# Altium PCB PCB1.PcbDoc
Units mm, origin at the board's own origin, x right, y up, seen from the top; angles counter-clockwise.
Board outline 91.44 x 76.2 mm, 4 copper layers (Top Layer, Power, GND, Bottom Layer), stack 0.568 mm thick; 59 components, 52 nets, 311 pads, 99 vias.
Unrouted connection lines stored in the file: 2.
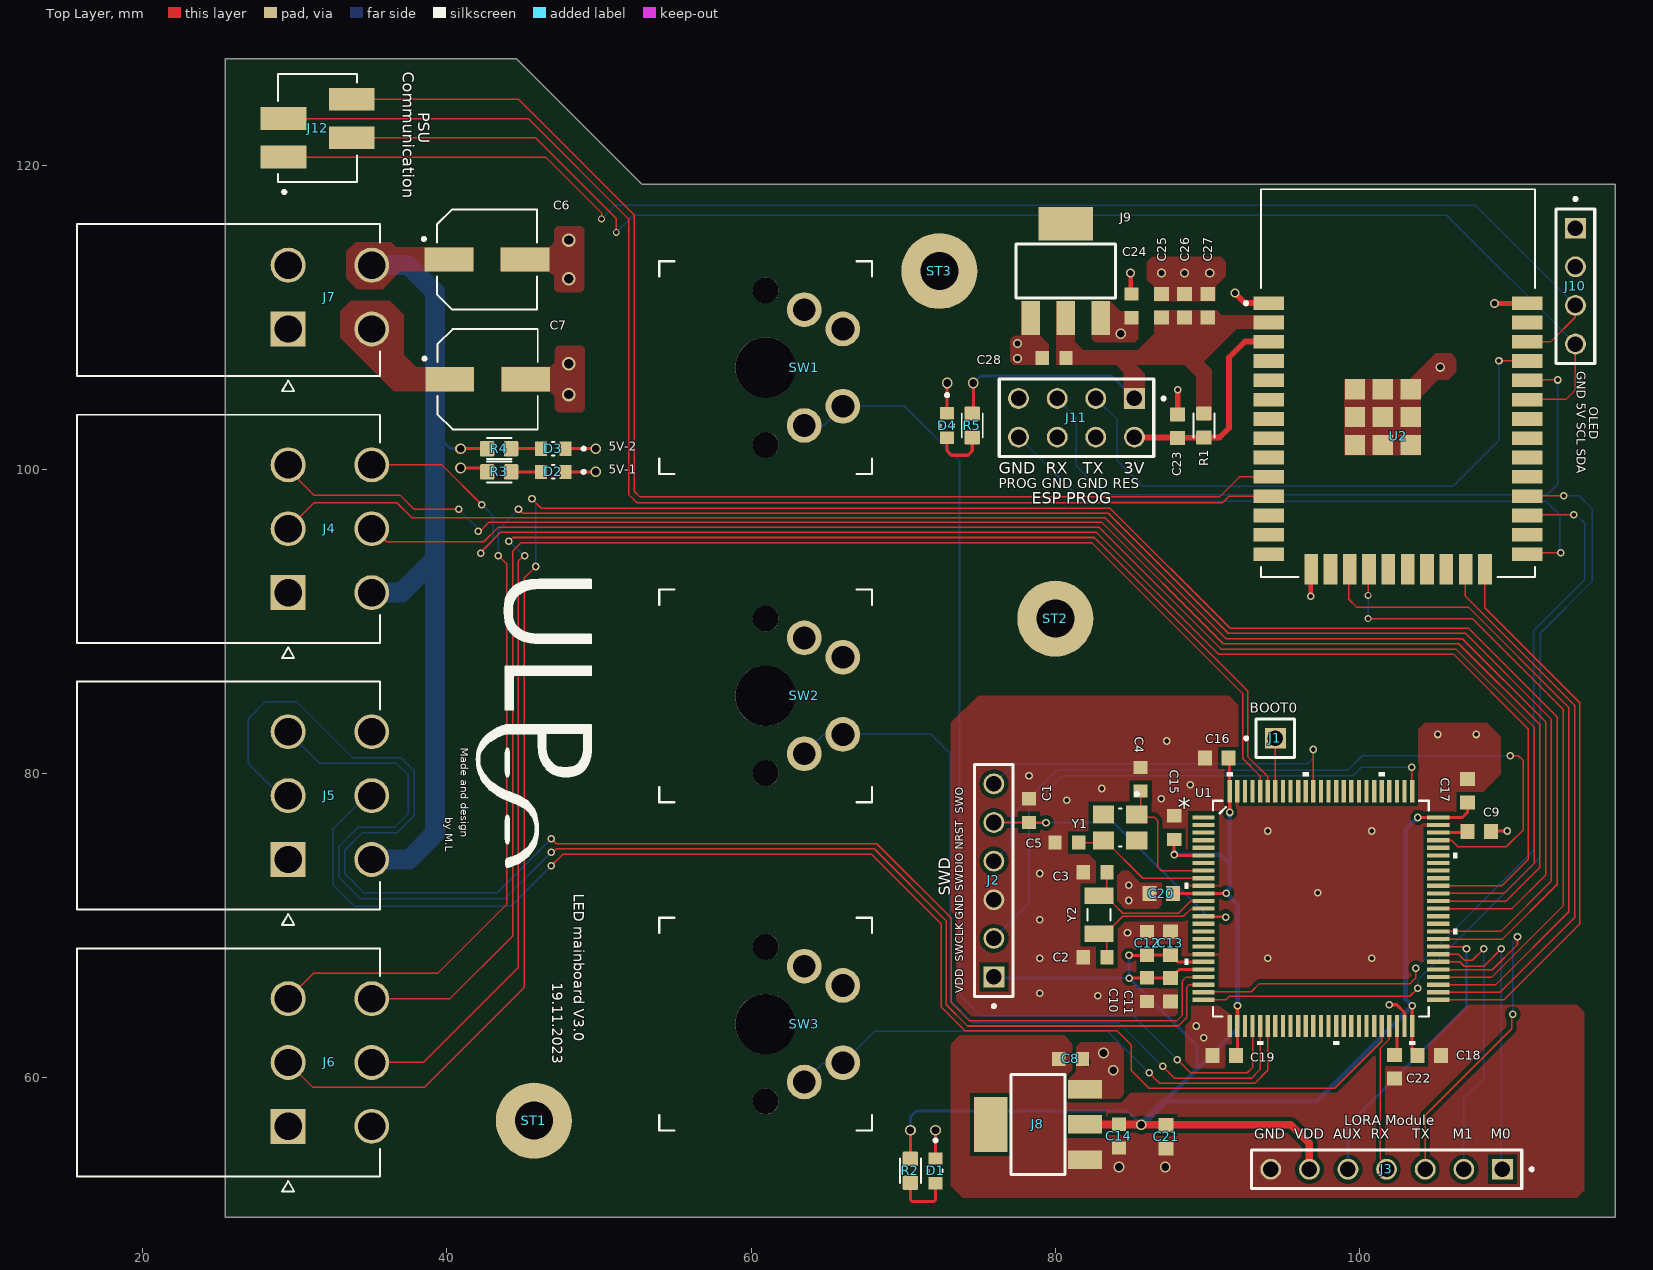
[diagram p0: Top Layer view]
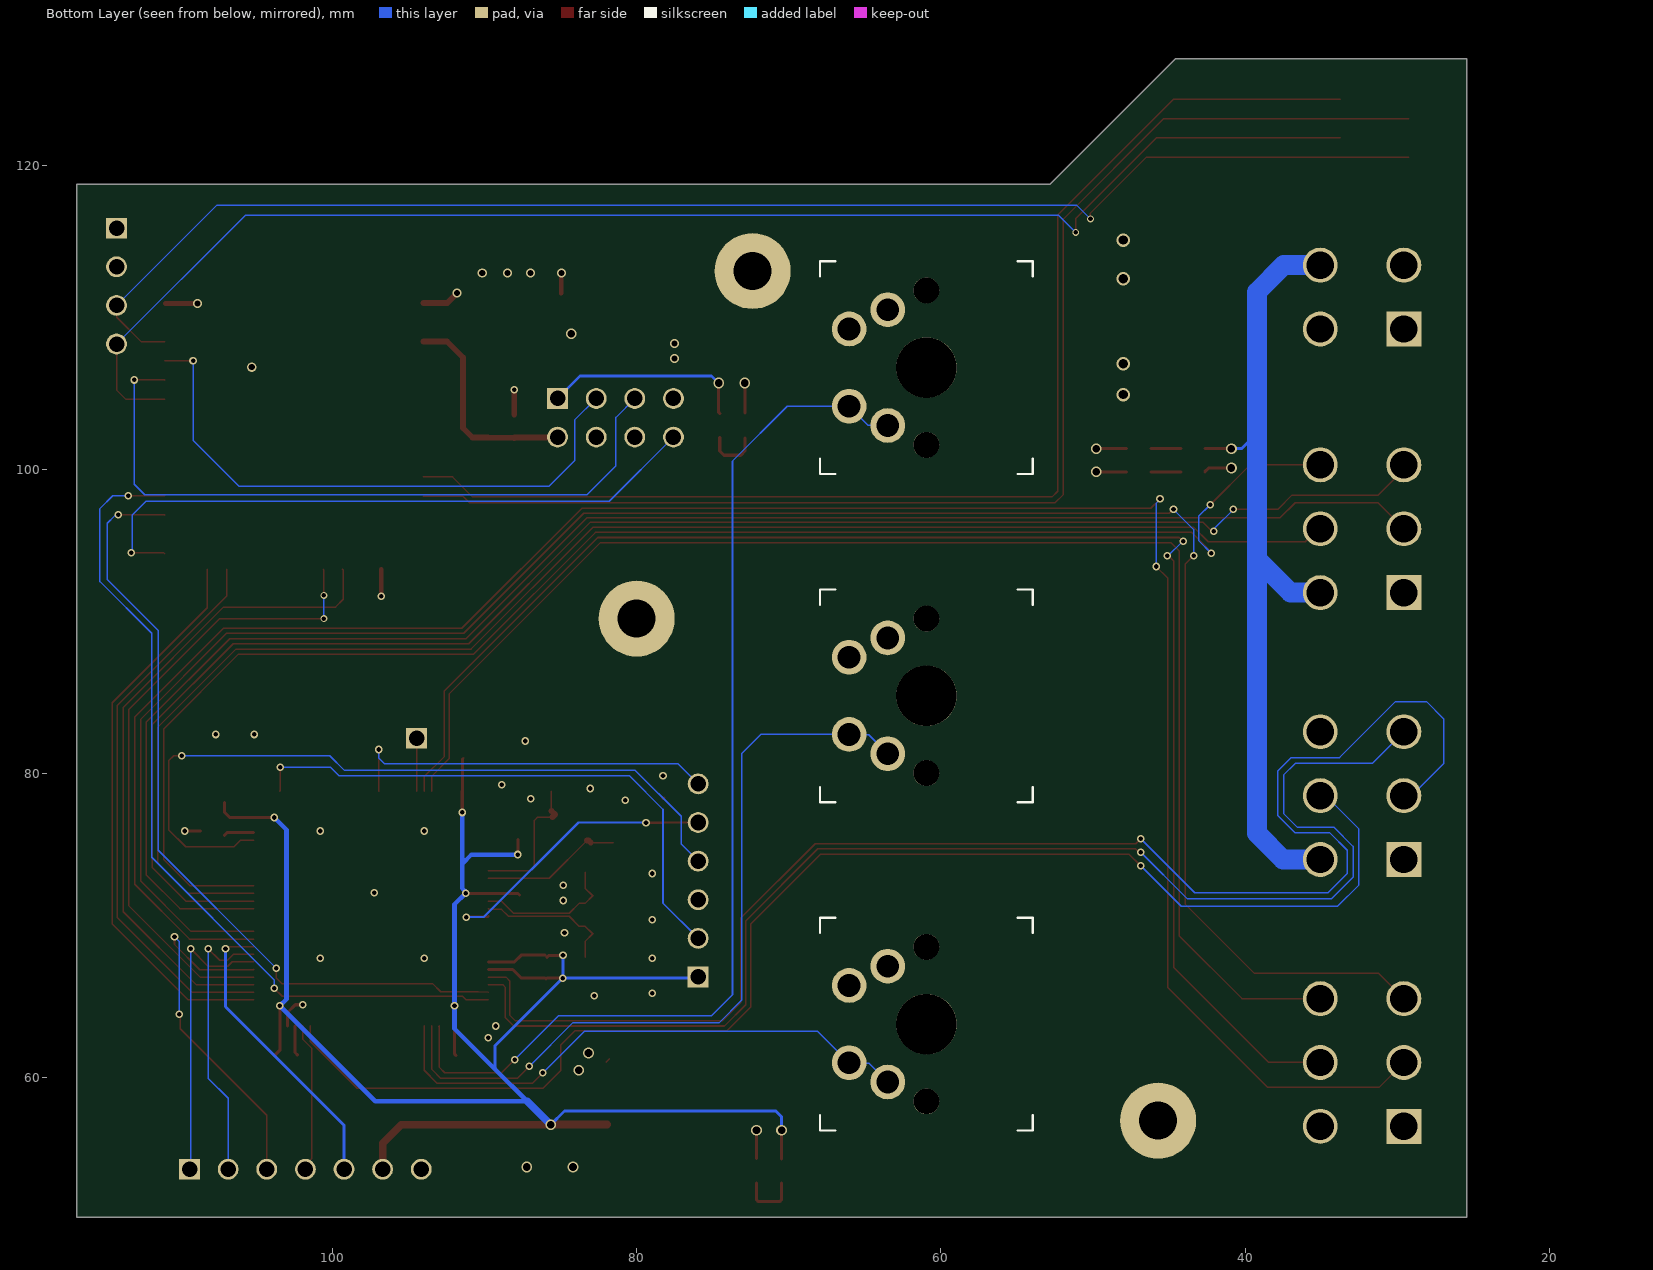
[diagram p1: Bottom Layer view, seen from below]
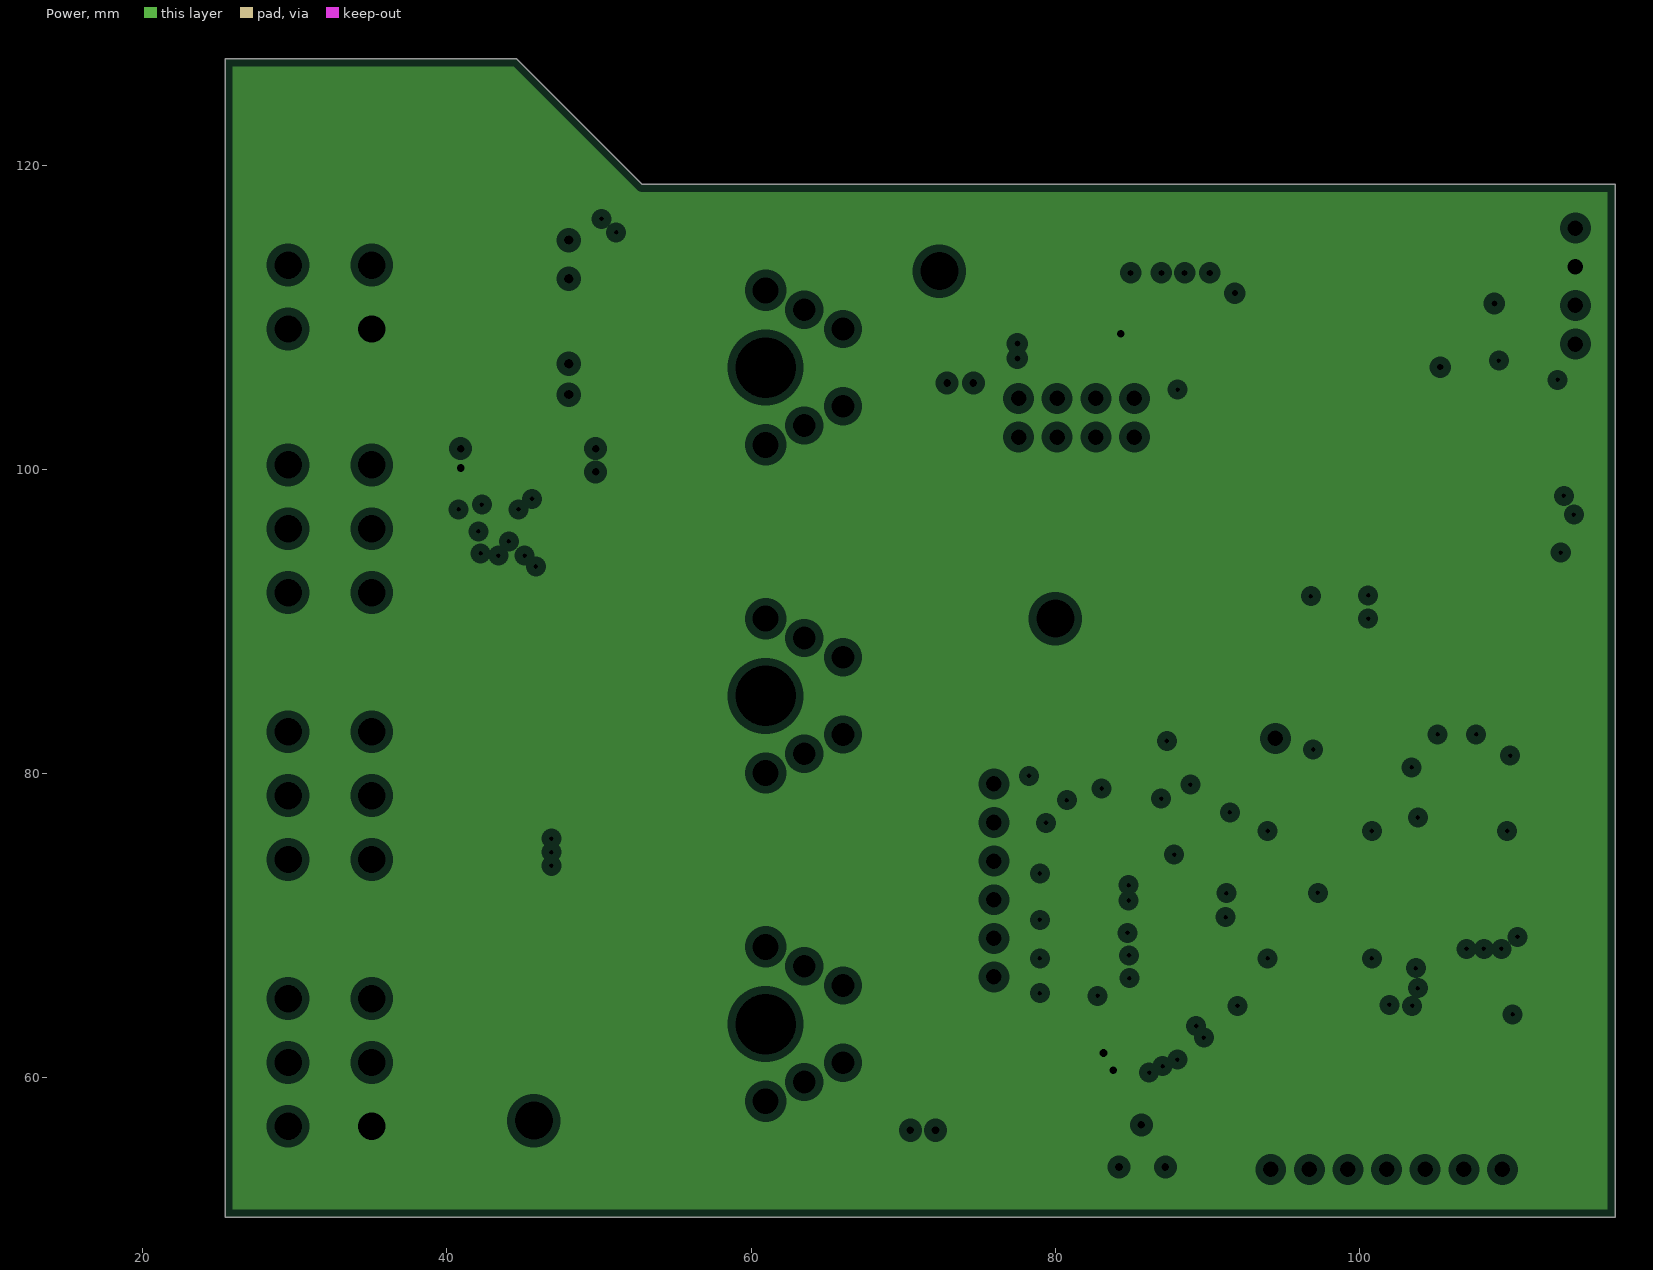
[diagram p2: Power, clearances drawn from the general rule]
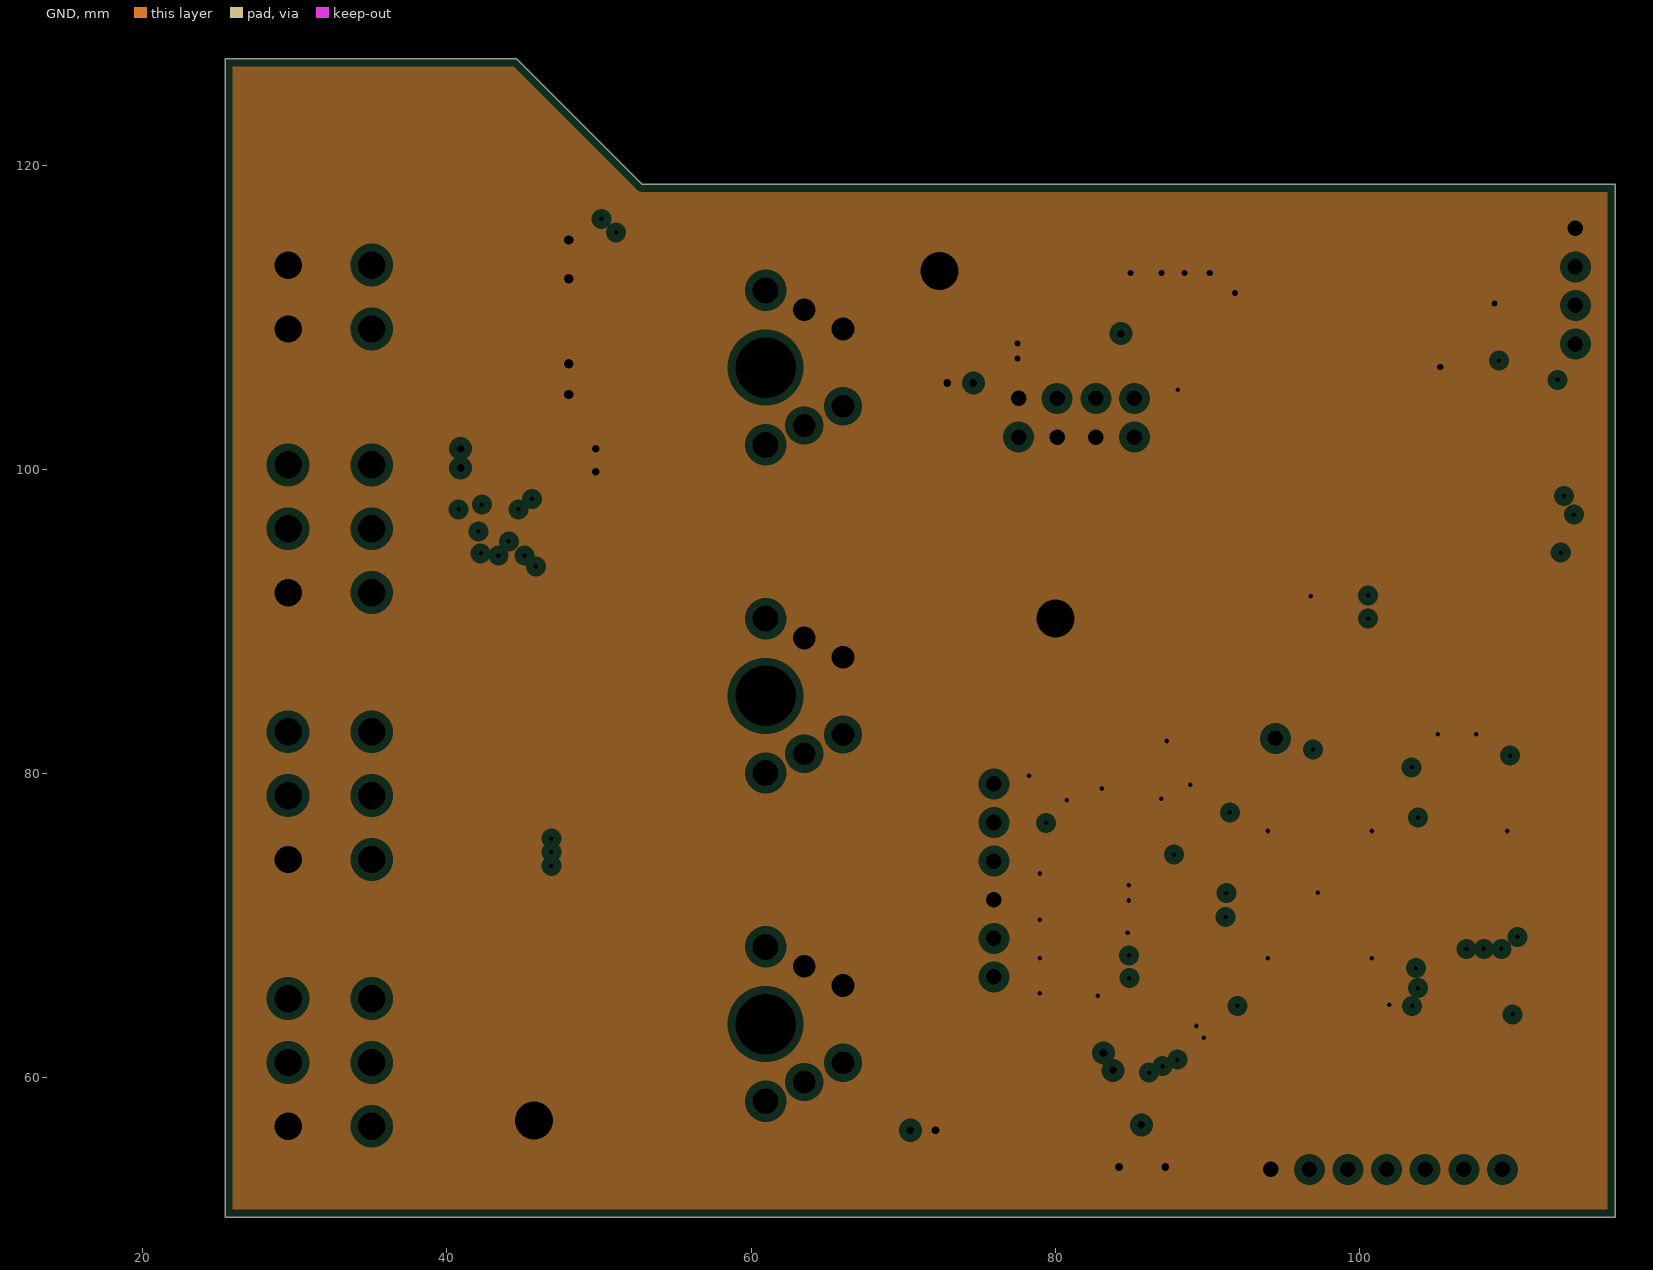
[diagram p3: GND, clearances drawn from the general rule]
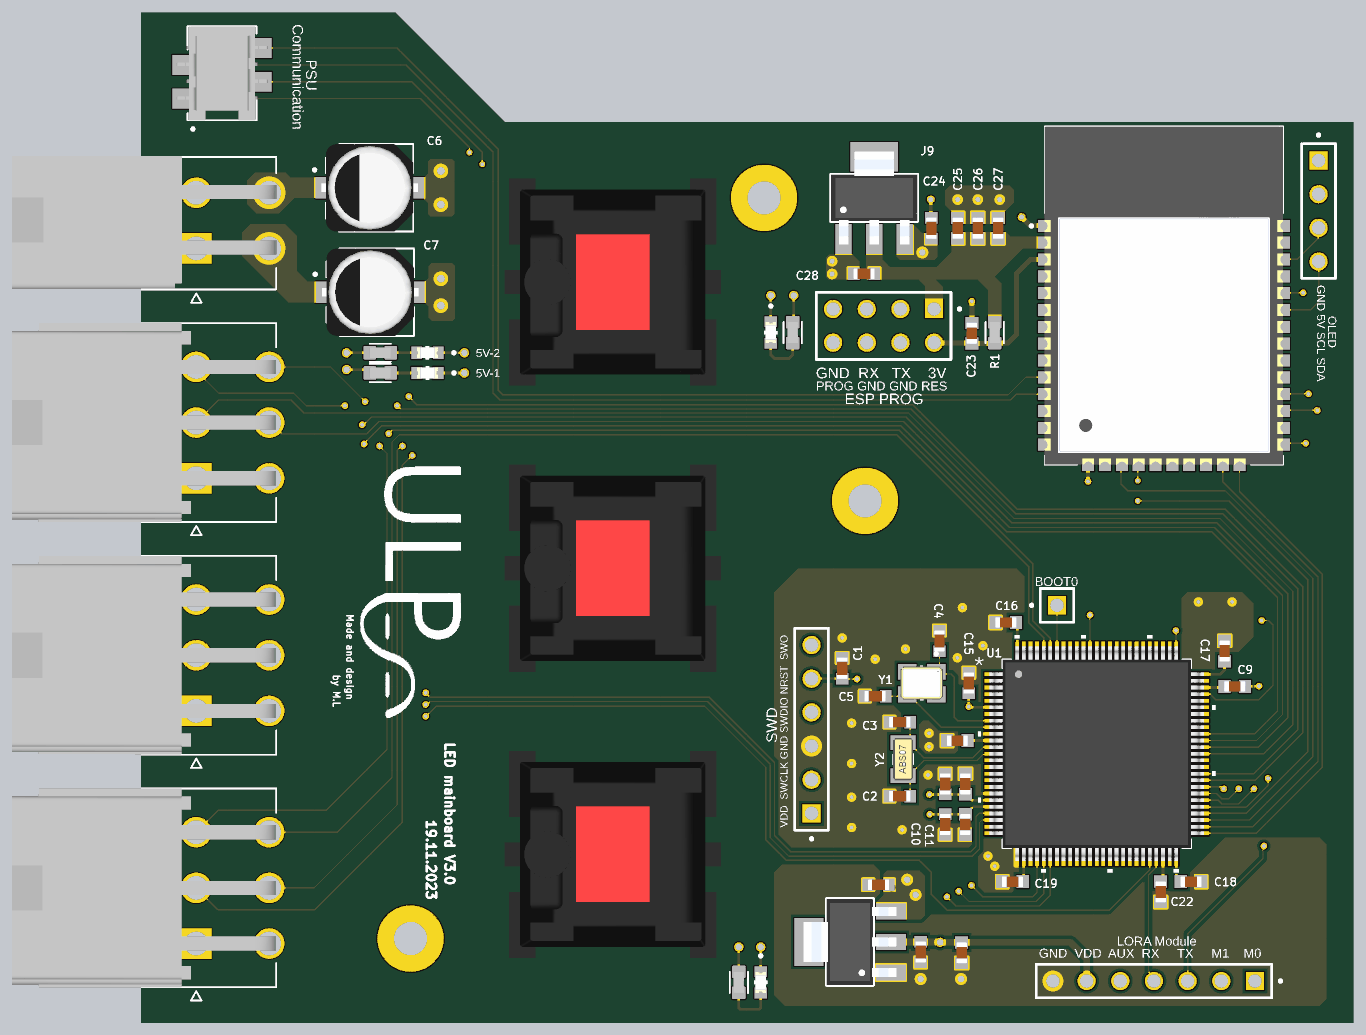
[diagram p4: 3D render of the assembled board from above, using the file's embedded part models]

## Layer stack, top to bottom
Top Solder: solder mask 0.0102, Solder Resist, Dk 3.5
Top Layer: signal copper 0.0356
Dielectric 2: prepreg 0.0711, PP-006, Dk 4.1
Power: plane copper 0.0175, net +5
Dielectric 1: dielectric 0.32, FR-4, Dk 4.8
GND: plane copper 0.0175, net GND
Dielectric 3: prepreg 0.0711, PP-006, Dk 4.1
Bottom Layer: signal copper 0.0356
Bottom Solder: solder mask 0.0102, Solder Resist, Dk 3.5

## Board outline
116.84,118.745 52.832,118.745 44.577,127 25.4,127 25.4,50.8 116.84,50.8

## Design rules (kind name [scope] priority, off if disabled: settings)
Clearance [All] p1: gap=0.254 ignorepadtopadclearanceinfootprint=FALSE except(0: Arc-Hole Track-Hole SMDPad-Hole THPad-Hole Via-Hole Fill-Hole Poly-Hole Region-Hole Text-Hole; 0.09: Arc-Arc Arc-Track Track-Track; 0.127: SMDPad-SMDPad; 0.5: SMDPad-THPad)
PlaneClearance [All] p1: clearance=0.508
PlaneConnect [All] p1: planeconnectstyle=Relief reliefexpansion=0.508 reliefentries=4 reliefconductorwidth=0.254 reliefairgap=0.254
PolygonConnect [All] p1: connectstyle=Direct reliefconductorwidth=0.254 reliefentries=4 polygonreliefangle="90 Angle" airgapwidth=0.254
RoutingVias [All] p1: holewidth=0.711 width=1.27 viastyle="Through Hole" minholewidth=0.3 minwidth=0.45 maxholewidth=0.711 maxwidth=1.27
SolderMaskExpansion [All] p1: expansion=0.102 istentingtop=FALSE
Width [All] p1: maxlimit=2 minlimit=0.09 preferedwidth=0.2
28 further rules are at their usual default settings.

## Classes and differential pairs
component class STM32_IO: C1 C2 C3 C4 C5 J1 J2 J3 J4 J5 J6 SW1 SW2 SW3 U1 Y1 Y2
component class Power: C6 C7 C8 C9 C10 C11 C12 C13 C14 C15 C16 C17 C18 C19 C20 C21 C22 D1 D2 D3 J7 J8 R2 R3 R4 ST1 ST2 ST3
component class ESP32: C23 C24 C25 C26 C27 C28 D4 J9 J10 J11 J12 R1 R5 U2

## Components (designator, comment, footprint, x,y, rotation, side; value= is the part's Value field where it differs from the comment)
C1 "CL10C180JB8NNNC" CAPC1608X90N#1 78.283,77.546 r90 top
C2 "CL10C180JB8NNNC" CAPC1608X90N#1 82.626,67.894 r0 top
C3 "CL10C180JB8NNNC" CAPC1608X90N#1 82.626,73.482 r0 top
C4 "CL10C100JB8NNNC" CAPC1608X90N#1 85.623,79.604 r270 top
C5 "CL10C100JB8NNNC" CAPC1608X90N#1 80.772,75.438 r0 top
C6 "EEEFT1E101AP" CAP_EEEFT1E101AP 42.632,113.792 r0 top
C7 "EEEFT1E101AP" CAP_EEEFT1E101AP 42.672,105.918 r0 top
C8 "CL10A105KA8NNNC" CAPC1608X90N#1 81.026,61.214 r180 top
C9 "CL10A225KO8NNNC" CAPC1608X90N#2 107.899,76.175 r180 top
C10 "CL10A105KA8NNNC" CAPC1608X90N#1 86.055,65.761 r270 top
C11 "06035C104KAT2A" CAPC1608X90N#2 87.579,65.761 r90 top
C12 "CL10A105KA8NNNC" CAPC1608X90N#1 86.055,68.809 r90 top
C13 "06035C104KAT2A" CAPC1608X90N#2 87.579,68.809 r270 top
C14 "CL10A105KA8NNNC" CAPC1608X90N#1 84.201,56.134 r270 top
C15 "CL10A105KA8NNNC" CAPC1608X90N#1 87.833,76.429 r90 top
C16 "06035C104KAT2A" CAPC1608X90N#2 90.627,81.001 r0 top
C17 "06035C104KAT2A" CAPC1608X90N#2 107.137,78.842 r270 top
C18 "06035C104KAT2A" CAPC1608X90N#2 104.597,61.443 r180 top
C19 "06035C104KAT2A" CAPC1608X90N#2 91.135,61.443 r0 top
C20 "06035C104KAT2A" CAPC1608X90N#2 86.97,72.085 r0 top
C21 "CL10A475MA8NQNC" CAPC1608X90N#2 87.3,56.083 r90 top
C22 "CL10A225KO8NNNC" CAPC1608X90N#2 102.311,60.681 r270 top
C23 "06035C104KAT2A" CAPC1608X90N#2 88.062,102.819 r270 top
C24 "CL10A105KA8NNNC" CAPC1608X90N#1 85.014,110.744 r90 top
C25 "06035C104KAT2A" CAPC1608X90N#2 86.995,110.744 r90 top
C26 "06035C104KAT2A" CAPC1608X90N#2 88.519,110.744 r270 top
C27 "06035C104KAT2A" CAPC1608X90N#2 90.043,110.744 r270 top
C28 "CL10A105KA8NNNC" CAPC1608X90N#1 79.934,107.315 r0 top
D1 "LTST-C190KGKT" LEDC1608X35N 72.136,53.848 r270 top
D2 "LTST-C191TBKT" LEDC1608X35N 46.99,99.822 r180 top
D3 "LTST-C191TBKT" LEDC1608X35N 46.99,101.346 r180 top
D4 "LTST-C190KGKT" LEDC1608X35N 72.898,102.87 r270 top
J1 "TSW-101-07-G-S" SAMTEC_TSW-101-07-G-S 94.488,82.296 r0 top
J2 "TSW-106-07-G-S" SAMTEC_TSW-106-07-G-S 75.971,72.949 r90 top
J3 "TSW-107-07-G-S" SAMTEC_TSW-107-07-G-S 101.803,53.95 r180 top
J4 "874270602" MOLEX_874270602 29.552,91.879 r270 top
J5 "874270602" MOLEX_874270602 29.552,74.328 r270 top
J6 "874270602" MOLEX_874270602 29.552,56.776 r270 top
J7 "353180420" MOLEX_353180420 29.552,109.22 r270 top
J8 "LD1117AS33TR" SOT223 78.867,56.896 r90 top
J9 "LD1117AS33" SOT223 80.696,113.03 r0 top
J10 "TSW-104-07-G-S" SAMTEC_TSW-104-07-G-S 114.224,112.039 r270 top
J11 "TSW-104-07-G-D" SAMTEC_TSW-104-07-G-D 81.407,103.378 r180 top
J12 "7-188275-4" TE_7-188275-4 31.496,122.428 r90 top
R1 "2176051-5" RESC1608X50N 89.789,102.87 r270 top
R2 "RP73PF1J10KBTDF" RESC1608X50N 70.485,53.848 r90 top
R3 "RP73PF1J10KBTDF" RESC1608X50N 43.434,99.822 r180 top
R4 "RP73PF1J10KBTDF" RESC1608X50N 43.434,101.346 r180 top
R5 "RP73PF1J10KBTDF" RESC1608X50N 74.549,102.87 r90 top
ST1 "PTH-M2D5X5" PTH-M2D5X5 45.72,57.15 r0 top
ST2 "PTH-M2D5X5" PTH-M2D5X5 80.01,90.17 r0 top
ST3 "PTH-M2D5X5" PTH-M2D5X5 72.39,113.03 r0 top
SW1 "Kailh" SW_MX_reversible 60.96,106.68 r270 top
SW2 "Kailh" SW_MX_reversible 60.96,85.09 r270 top
SW3 "Kailh" SW_MX_reversible 60.96,63.5 r270 top
U1 "STM32H723VGT6" LQFP100_STM 97.485,71.095 r0 top
U2 "ESP32-WROOM-32" MODULE_ESP32-WROOM-32 102.556,105.662 r0 top
Y1 "QT325G-25.000MEEV-T" XTAL_QT325G-25.000MEEV-T 84.277,76.429 r270 top
Y2 "ABS07-32.768KHZ-T" XTAL_ABS07-32.768KHZ-T 82.88,70.688 r90 top

## Footprints (in the part's own frame and the unit in brackets; to place one, negate y for a bottom-side part, rotate by r counter-clockwise, add the part's x,y. Pads: shape width x height; smd on the part's side, far side on the other; paste and mask are expansions set on the pad)
CAP_EEEFT1E101AP [mm]
  rect 3.2x1.6 smd: 1(-2.5,0) 2(2.5,0)
  silkscreen extent -4.25,-3.3 3.3,3.3, body extent -3.65,-3.3 3.65,3.3, height 5.8
CAPC1608X90N#1 [mm]
  rect 0.87x0.93 smd: 1(-0.78,0) 2(0.78,0)
  body extent -0.8,-0.4 0.8,0.4, height 0.45
CAPC1608X90N#2 [mm]
  rect 0.92x0.98 smd: 1(-0.775,0) 2(0.775,0)
  body extent -0.8,-0.41 0.8,0.41, height 0.9
LEDC1608X35N [mm]
  rect 0.81x0.93 smd: A(0.81,0) C(-0.81,0)
  silkscreen extent -2.1,-0.45 0.09,0.45, body extent -0.8,-0.4 0.8,0.4, height 0.8
LQFP100_STM [mil]
  rect 58x11 smd paste-29 mask+5: 1(-304,236.22) 2(-304,216.54) 3(-304,196.85) 4(-304,177.17) 5(-304,157.48) 6(-304,137.8) 7(-304,118.11) 8(-304,98.43) 9(-304,78.74) 10(-304,59.06) 11(-304,39.37) 12(-304,19.69) 13(-304,0) 14(-304,-19.68) 15(-304,-39.37) 16(-304,-59.06) 17(-304,-78.74) 18(-304,-98.43) 19(-304,-118.11) 20(-304,-137.8) 21(-304,-157.48) 22(-304,-177.17) 23(-304,-196.85) 24(-304,-216.54) 25(-304,-236.22) 51(304,-236.22) 52(304,-216.54) 53(304,-196.85) 54(304,-177.17) 55(304,-157.48) 56(304,-137.8) 57(304,-118.11) 58(304,-98.43) 59(304,-78.74) 60(304,-59.06) 61(304,-39.37) 62(304,-19.68) 63(304,0) 64(304,19.68) 65(304,39.37) 66(304,59.06) 67(304,78.74) 68(304,98.43) 69(304,118.11) 70(304,137.8) 71(304,157.48) 72(304,177.17) 73(304,196.85) 74(304,216.54) 75(304,236.22)
  rect 11x58 smd paste-29 mask+5: 26(-236.22,-304) 27(-216.54,-304) 28(-196.85,-304) 29(-177.17,-304) 30(-157.48,-304) 31(-137.8,-304) 32(-118.11,-304) 33(-98.43,-304) 34(-78.74,-304) 35(-59.06,-304) 36(-39.37,-304) 37(-19.68,-304) 38(0,-304) 39(19.68,-304) 40(39.37,-304) 41(59.06,-304) 42(78.74,-304) 43(98.43,-304) 44(118.11,-304) 45(137.8,-304) 46(157.48,-304) 47(177.17,-304) 48(196.85,-304) 49(216.54,-304) 50(236.22,-304) 76(236.22,304) 77(216.54,304) 78(196.85,304) 79(177.17,304) 80(157.48,304) 81(137.8,304) 82(118.11,304) 83(98.43,304) 84(78.74,304) 85(59.06,304) 86(39.37,304) 87(19.68,304) 88(0,304) 89(-19.68,304) 90(-39.37,304) 91(-59.06,304) 92(-78.74,304) 93(-98.43,304) 94(-118.11,304) 95(-137.8,304) 96(-157.48,304) 97(-177.17,304) 98(-196.85,304) 99(-216.54,304) 100(-236.22,304)
  silkscreen extent -353,-353 353,353, body extent -319,-319 319,319, height 63
MODULE_ESP32-WROOM-32 [mm]
  rect 2x0.9 smd: 1(-8.5,5.26) 2(-8.5,3.99) 3(-8.5,2.72) 4(-8.5,1.45) 5(-8.5,0.18) 6(-8.5,-1.09) 7(-8.5,-2.36) 8(-8.5,-3.63) 9(-8.5,-4.9) 10(-8.5,-6.17) 11(-8.5,-7.44) 12(-8.5,-8.71) 13(-8.5,-9.98) 14(-8.5,-11.25) 25(8.5,-11.25) 26(8.5,-9.98) 27(8.5,-8.71) 28(8.5,-7.44) 29(8.5,-6.17) 30(8.5,-4.9) 31(8.5,-3.63) 32(8.5,-2.36) 33(8.5,-1.09) 34(8.5,0.18) 35(8.5,1.45) 36(8.5,2.72) 37(8.5,3.99) 38(8.5,5.26)
  rect 0.9x2 smd: 15(-5.715,-12.25) 16(-4.445,-12.25) 17(-3.175,-12.25) 18(-1.905,-12.25) 19(-0.635,-12.25) 20(0.635,-12.25) 21(1.905,-12.25) 22(3.175,-12.25) 23(4.445,-12.25) 24(5.715,-12.25)
  rect 1.33x1.33 smd: 39_1(-2.835,-0.405) 39_2(-1,-0.405) 39_3(0.835,-0.405) 39_4(-2.835,-2.24) 39_5(-1,-2.24) 39_6(0.835,-2.24) 39_7(-2.835,-4.075) 39_8(-1,-4.075) 39_9(0.835,-4.075)
  silkscreen extent -10.1,-12.75 9,12.75, body extent -9,-12.75 9,12.75, height 3.2
MOLEX_353180420 [mm]
  rect 2.3x2.3 / inner round 2.3 / far side rect 2.3x2.3 hole 1.8 mask+0.076: 1(0,0)
  round 2.3 hole 1.8 mask+0.076: 2(-4.2,0) 3(0,5.5) 4(-4.2,5.5)
  silkscreen extent -6.9,-13.9 4.1,6.04, body extent -6.96,-13.89 3.04,6.04, height 12.83
MOLEX_874270602 [mm]
  rect 2.3x2.3 / inner round 2.3 / far side rect 2.3x2.3 hole 1.8 mask+0.076: 1(0,0)
  round 2.3 hole 1.8 mask+0.076: 2(-4.2,0) 3(-8.4,0) 4(0,5.5) 5(-4.2,5.5) 6(-8.4,5.5)
  silkscreen extent -11.7,-13.9 4.3,6.04, body extent -11.7,-13.9 3.3,6.03, height 11.4
PTH-M2D5X5 [mm]
  round 5 hole 2.5: 1(0,0)
RESC1608X50N [mm]
  rrect20% 0.94x1.02 smd: 1(-0.79,0) 2(0.79,0)
  silkscreen extent -0.8,-0.69 0.8,0.69, body extent -0.8,-0.4 0.8,0.4, height 0.23
SAMTEC_TSW-101-07-G-S [mm]
  rect 1.37x1.37 hole 1.02: 01(0,0)
  silkscreen extent -2.02,-1.27 1.27,1.27
SAMTEC_TSW-104-07-G-D [mm]
  rect 1.37x1.37 hole 1.02: 01(-3.81,-1.27)
  round 1.37 hole 1.02: 02(-3.81,1.27) 03(-1.27,-1.27) 04(-1.27,1.27) 05(1.27,-1.27) 06(1.27,1.27) 07(3.81,-1.27) 08(3.81,1.27)
  silkscreen extent -5.83,-2.54 5.08,2.54
SAMTEC_TSW-104-07-G-S [mm]
  rect 1.37x1.37 hole 1.02: 01(-3.81,0)
  round 1.37 hole 1.02: 02(-1.27,0) 03(1.27,0) 04(3.81,0)
  silkscreen extent -5.83,-1.27 5.08,1.27
SAMTEC_TSW-106-07-G-S [mm]
  rect 1.37x1.37 hole 1.02: 01(-6.35,0)
  round 1.37 hole 1.02: 02(-3.81,0) 03(-1.27,0) 04(1.27,0) 05(3.81,0) 06(6.35,0)
  silkscreen extent -8.37,-1.27 7.62,1.27
SAMTEC_TSW-107-07-G-S [mm]
  rect 1.37x1.37 hole 1.02: 01(-7.62,0)
  round 1.37 hole 1.02: 02(-5.08,0) 03(-2.54,0) 04(0,0) 05(2.54,0) 06(5.08,0) 07(7.62,0)
  silkscreen extent -9.64,-1.27 8.89,1.27
SOT223 [mm]
  rect 1.219x2.235 smd: 1(-2.311,-3.099) 2(0,-3.099) 3(2.311,-3.099)
  rect 3.6x2.2 smd: TAB(0,3.099)
  silkscreen extent -3.28,-1.78 3.28,1.78, body extent -3.25,-3.5 3.25,3.5, height 1.8
SW_MX_reversible [mil]
  round 90 hole 59: 1(-150,100) 1(-100,200) 2(100,200) 2(150,100)
  round 157 hole 157: Un1(0,0)
  round 67 hole 67: Un2(200,0) Un3(-200,0)
  silkscreen extent -276,-276 276,276, body extent -308,-321 308,322, height 588
TE_7-188275-4 [mm]
  rect 1.5x3 smd: 1(-1.905,2.25) 2(-0.635,-2.25) 3(0.635,2.25) 4(1.905,-2.25)
  silkscreen extent -4.3,-2.6 3.55,2.6, body extent -3.55,-3.45 3.55,3.45, height 5.23
XTAL_ABS07-32.768KHZ-T [mm]
  rect 1.1x1.9 smd: 1(-1.25,0) 2(1.25,0)
  silkscreen extent -0.38,-0.75 0.38,0.75, body extent -1.6,-0.75 1.6,0.75, height 0.89
XTAL_QT325G-25.000MEEV-T [mm]
  rect 1.2x1.4 smd: 1(-0.85,1.1) 2(-0.85,-1.1) 3(0.85,-1.1) 4(0.85,1.1)
  silkscreen extent -2.3,-0.08 1.25,1.2, body extent -1.25,-1.6 1.25,1.6, height 0.9

## Part data
C1: library part CL10A105KA8NNNC, "100nF 0603", Package=None, Availability=Unavailable, MF="{'manufacturer': u'Samsung Electro-Mechanics'}", MP=CL10A105KA8NNNC, Price=None
C2 C3 C4 C5: library part CL10A105KA8NNNC, "18pf 0603", Package=None, Availability=Unavailable, MF="{'manufacturer': u'Samsung Electro-Mechanics'}", MP=CL10A105KA8NNNC, Price=None
C6 C7: "10uF 25V", Package=None, Availability=Unavailable, MF="{'manufacturer': u'Panasonic Electronic'}", MP=EEEFT1E101AP, Price=None
C8 C14: "10uf 0603", Package=None, Availability=Unavailable, MF="{'manufacturer': u'Samsung Electro-Mechanics'}", MP=CL10A105KA8NNNC, Price=None
C9 C22: library part 06035C104KAT2A, "2,2uf 0603", Package=None, Availability=Unavailable, MF="{'manufacturer': u'AVX'}", MP=06035C104KAT2A, Price=None
C10 C12 C15: "1uf 0603", Package=None, Availability=Unavailable, MF="{'manufacturer': u'Samsung Electro-Mechanics'}", MP=CL10A105KA8NNNC, Price=None
C11 C13 C16 C17 C18 C19 C20: "100nf 0603", Package=None, Availability=Unavailable, MF="{'manufacturer': u'AVX'}", MP=06035C104KAT2A, Price=None
C21: library part 06035C104KAT2A, "4,7uf 0603", Package=None, Availability=Unavailable, MF="{'manufacturer': u'AVX'}", MP=06035C104KAT2A, Price=None
C23 C25 C26 C27: "100nF 0603", Package=None, Availability=Unavailable, MF="{'manufacturer': u'AVX'}", MP=06035C104KAT2A, Price=None
C24 C28: "10uF 16V 0603", Package=None, Availability=Unavailable, MF="{'manufacturer': u'Samsung Electro-Mechanics'}", MP=CL10A105KA8NNNC, Price=None
D1 D4: "LED; SMD; 0603; Green; 18-180mcd; 1.6x0.8x0.8mm; 130Â°; 1.6Ă·2.4V; 20mA <a href=\"https://pricing.snapeda.com/parts/LTST-C190KGKT/Lite-On%20Inc./view-part?ref=eda\">Check availability</a>", Package=None, Availability=Unavailable, MF="{'manufacturer': u'Lite-On Electronics'}", MP=LTST-C190KGKT, Price=None
D2 D3: library part LTST-C190KGKT, "0603 blue", Package=None, Availability=Unavailable, MF="{'manufacturer': u'Lite-On Electronics'}", MP=LTST-C190KGKT, Price=None
J1 J2 J4 J5 J6 J9 J12 U2: Package=None, Availability=Unavailable, Price=None
  J1: MF="{'manufacturer': u'Samtec Inc.'}", MP=TSW-101-07-G-S
  J2: MF="{'manufacturer': u'Samtec Inc.'}", MP=TSW-106-07-G-S
  J4 J5 J6: MP=874270602
  J9: MF="{'manufacturer': u'STMicroelectronics'}", MP=LD1117AS33
  J12: MF="{'manufacturer': u'TE Connectivity'}", MP=7-188275-4
  U2: MF="{'manufacturer': u'Espressif Systems'}", MP=ESP32-WROOM-32
J3: "<a href=\"https://pricing.snapeda.com/parts/TSW-107-07-G-S/Samtec%20Inc./view-part?ref=eda\">Check availability</a>", Package=None, Availability=Unavailable, MF="{'manufacturer': u'Samtec Inc.'}", MP=TSW-107-07-G-S, Price=None
J7: "Connector Header Through Hole, Right Angle 4 position 0.165in (4.20mm)", Package=None, Availability=Unavailable, MF="{'manufacturer': u'Molex'}", MP=353180420, Price=None
J8: library part LD1117AS33, "Linear Voltage Regulator 3.3V, 1.15V drop", Package="SOT-223 STMicroelectronics", Availability="In Stock", Check_prices=https://www.snapeda.com/parts/LD1117AS33/STMicroelectronics/view-part/?ref=eda, MF=STMicroelectronics, MP=LD1117AS33, Price=None, Purchase-URL=https://pricing.snapeda.com/search/part/LD1117AS33/?ref=eda, SnapEDA_Link=https://www.snapeda.com/parts/LD1117AS33/STMicroelectronics/view-part/?ref=snap
J10: "2,54 goldpin", Package=None, Availability=Unavailable, MF="{'manufacturer': u'Samtec'}", MP=TSW-104-07-G-S, Price=None
J11: "2.54mm goldpin", Package=None, Availability=Unavailable, MF="{'manufacturer': u'Samtec'}", MP=TSW-104-07-G-D, Price=None
R1: "0603 10k ohm", Package=None, Availability=Unavailable, MF="{'manufacturer': u'TE Connectivity'}", MP=2176051-5, Price=None
R2 R5: "80Ohm 0603", Package=None, Availability=Unavailable, MF="{'manufacturer': u'TE Connectivity'}", MP=RP73PF1J10KBTDF, Price=None
R3 R4: "20Ohm 0603", Package=None, Availability=Unavailable, MF="{'manufacturer': u'TE Connectivity'}", MP=RP73PF1J10KBTDF, Price=None
ST1 ST2 ST3: library part CMP-00028-00004-2, "M2 PTH (2.5mm), 5mm pad", Pins=1
SW1 SW2 SW3: library part Component_1, "Kailh mechanical switch"
U1: "No Description Available", Mfr_Name=STMicroelectronics, Copyright="Copyright (C) 2023 Ultra Librarian. All rights reserved.", Manufacturer_Part_Number=STM32H723VGT6, RefDes=RefDes, Type=DEV
Y1: "25 MHz Â±10ppm Crystal 8pF 60 Ohms 4-SMD, No Lead", Package="NON STANDARD-4 QST PRODUCTS LLC", Check_prices=https://www.snapeda.com/parts/QT325G-25.000MEEV-T/QST+PRODUCTS+LLC/view-part/?ref=eda, MF="QST PRODUCTS LLC", MP=QT325G-25.000MEEV-T, SnapEDA_Link=https://www.snapeda.com/parts/QT325G-25.000MEEV-T/QST+PRODUCTS+LLC/view-part/?ref=snap
Y2: "<a href=\"https://pricing.snapeda.com/parts/ABS07-32.768KHZ-T/Abracon%20LLC/view-part?ref=eda\">Check availability</a> <a href=\"https://pricing.snapeda.com/parts/ABS07-32.768KHZ-T/Abracon%20LLC/view-part?ref=eda\">Check availability</a>", Package=None, Availability=Unavailable, MF="{'manufacturer': u'SHENZHEN YANGXING TECHNOLOGY CO., LTD.'}", MP=ABS07-32.768KHZ-T, Price=None

## Via types
v1: diameter 0.5, hole 0.3, Top Layer to Bottom Layer, 68 vias
v2: diameter 0.7, hole 0.5, Top Layer to Bottom Layer, 14 vias
v3: diameter 0.6, hole 0.4, Top Layer to Bottom Layer, 9 vias
v4: diameter 0.45, hole 0.3, Top Layer to Bottom Layer, 4 vias
v5: diameter 0.9, hole 0.6, Top Layer to Bottom Layer, 4 vias

## Nets (pads, with @x,y where several pads share a name; then routed paths per layer and width w, separated by ;. In a path a pad name is that pad's centre, name@x,y a point inside that pad or via, vN(x,y) a via of type N, cw(c..) or ccw(c..) an arc to the next point about the centre after c; other vN are vias at no path point)
3V3-ESP32: C25.1 C26.2 C27.2 C28.2 J9.2 J11.01 R1.1 R5.2 U2.2 | length 13.4
  Top Layer w0.2: R5.2 74.625,103.736 v2(74.625,105.664)
  Bottom Layer w0.2: v2(74.625,105.664) 74.63,105.664 75.087,106.121 83.744,106.121 J11.01
+5: C7.1 C8.1 C24.1 J6.4 J7.3 J8.3 J9.3 J10.02 R3.2 | length 2.2
  Top Layer w0.1: C8.1 C8.1@82.017,61.003
  Top Layer w0.2: v2(40.894,100.076) 42.39,100.076 R3.2
  other v2: 83.82,60.452 83.185,61.595 84.328,108.915
+5-D1: C6.1 J4.4 J5.4 J7.4 R4.2 | length 54.3
  Top Layer w0.2: v2(40.894,101.346) R4.2
  Bottom Layer w0.2: 39.218,102.362 40.234,101.346 v2(40.894,101.346)
  Bottom Layer w1.3: J5.4 37.498,74.328 39.218,76.048 39.218,94.082 ; J4.4 37.015,91.879 39.218,94.082 ; J7.4 37.456,113.42 39.218,111.658 39.218,102.362 39.218,94.082
DIS0-CH0: J6.2 U1.59 | length 145.2
  Top Layer w0.1: J6.2 31.194,59.334 38.506,59.334 45.085,65.913 45.085,92.837 v1(45.847,93.599) ; v1(45.593,98.044) 46.203,97.434 83.617,97.434 91.516,89.535 107.188,89.535 113.03,83.693 113.03,72.695 109.43,69.095 U1.59
  Bottom Layer w0.1: v1(45.593,98.044) 45.593,97.986 45.847,97.732 v1(45.847,93.599)
DIS0-CH1: J6.3 U1.60 | length 136.8
  Top Layer w0.1: J6.3 31.203,66.827 39.37,66.827 43.942,71.399 43.942,93.751 v1(43.383,94.31) ; v1(44.704,97.353) 44.739,97.353 44.988,97.104 83.49,97.104 91.389,89.205 106.985,89.205 112.649,83.541 112.649,72.923 109.32,69.595 U1.60
  Bottom Layer w0.1: v1(43.383,94.31) 43.383,96.033 v1(44.704,97.353)
DIS0-CH2: J6.5 U1.95 | length 101
  Top Layer w0.1: J6.5 38.447,60.976 44.704,67.234 44.704,93.98 45.034,94.31 v1(45.11,94.31) ; v1(44.069,95.25) 44.323,95.504 82.575,95.504 92.659,85.42 92.659,81.102 93.985,79.776 U1.95
  Bottom Layer w0.1: v1(44.069,95.25) 44.12,95.25 45.06,94.31 v1(45.11,94.31)
DIS0-CH3: J6.6 U1.96 | length 95.6
  Top Layer w0.1: J6.6 40.208,65.176 44.323,69.291 44.323,94.615 44.882,95.174 82.398,95.174 92.354,85.217 92.354,80.95 93.485,79.819 U1.96
DIS1-CH0: J4.2 U1.63 | length 107.4
  Top Layer w0.1: J4.2 31.263,97.79 36.703,97.79 37.694,96.799 83.287,96.799 91.237,88.849 106.782,88.849 112.268,83.363 112.268,73.304 110.058,71.095 U1.63
DIS1-CH1: J4.3 U1.64 | length 107.1
  Top Layer w0.1: J4.3 29.552,99.988 31.242,98.298 36.903,98.298 37.847,97.353 v1(40.767,97.353) ; v1(42.062,95.91) 42.165,95.91 42.75,96.495 83.083,96.495 91.059,88.519 106.553,88.519 111.887,83.185 111.887,73.812 109.669,71.595 U1.64
  Bottom Layer w0.1: v1(40.767,97.353) 41.953,96.167 41.953,96.128 42.062,96.019 v1(42.062,95.91)
DIS1-CH2: J4.5 U1.65 | length 98.7
  Top Layer w0.1: J4.5 35.181,96.079 36.036,95.225 42.418,95.225 43.358,96.164 82.906,96.164 90.907,88.163 106.375,88.163 111.506,83.033 111.506,74.066 109.534,72.095 U1.65
DIS1-CH3: J4.6 U1.66 | length 102.3
  Top Layer w0.1: J4.6 39.675,100.279 v1(42.291,97.663) ; v1(42.215,94.463) 42.215,94.539 43.51,95.834 82.728,95.834 90.729,87.833 106.197,87.833 111.125,82.906 111.125,74.32 109.399,72.595 U1.66
  Bottom Layer w0.1: v1(42.215,94.463) 43.053,95.301 43.053,96.901 v1(42.291,97.663)
ERR1-flag: U1.52 U2.23 | length 36.9
  Top Layer w0.1: U1.52 109.257,65.595 114.173,70.51 114.173,84.455 106.988,91.64 U2.23@106.988,93.425
ERR2-flag: U1.51 U2.24 | length 37.3
  Top Layer w0.1: U1.51 109.519,65.095 114.503,70.079 114.503,84.633 108.258,90.878 U2.24@108.258,93.425
GND: C1.2 C2.1 C3.1 C4.1 C5.1 C6.2 C7.2 C8.2 C9.1 C10.2 C11.1 C12.2 C13.1 C14.2 C15.2 C16.1 C17.1 C18.1 C19.1 C20.1 C21.1 C22.2 C23.1 C24.2 C25.2 C26.1 C27.1 C28.1 D1.C D2.C D3.C D4.C J2.03 J3.07 J4.1 J5.1 J6.1 J7.1 J7.2 J8.1 J9.1 J10.01 J11.04 J11.06 J11.07 ST1.1 ST2.1 ST3.1 SW1.1 SW2.1 SW3.1 U1.10 U1.19 U1.26 U1.49 U1.74 U1.99 U2.1 U2.15 U2.38 U2.39_1 U2.39_2 U2.39_3 U2.39_4 U2.39_5 U2.39_6 U2.39_7 U2.39_8 U2.39_9 | length 20.5
  Top Layer w0.1: U2.15@96.825,93.422 U2.15@96.828,93.425 ; C9.1 C9.1@108.7,76.2 ; U2.38@111.004,110.896 U2.38@111.043,110.935
  Top Layer w0.2: D2.C v2(49.784,99.822) ; D3.C v2(49.784,101.346) ; D1.C v2(72.136,56.515) ; D4.C v2@72.898,105.613 ; C1.2@78.232,78.377 C1.2 ; C24.2@84.963,111.575 C24.2 ; v1(101.981,64.77) 102.465,64.77 102.979,64.256 102.979,63.379 U1.49 ; C9.1@108.7,76.2 v1(109.728,76.2)
  Top Layer w0.3: C24.2@84.963,111.575 v3(84.963,112.903) ; v1(96.825,91.643) U2.15@96.825,93.422 ; v3(108.89,110.896) U2.38@111.004,110.896
  Top Layer w0.381: C23.1 v1(88.062,105.232) ; v3(91.821,111.582) 92.468,110.935 U2.1@94.043,110.935
  other v1: 89.789,62.611 89.281,63.373 82.804,65.354 78.994,65.532 78.994,67.818 93.98,67.818 100.838,67.818 84.76,69.494 78.994,70.358 84.836,71.628 97.282,72.136 84.836,72.644 78.994,73.406 93.98,76.2 100.838,76.2 80.772,78.232 86.97,78.334 83.058,78.994 88.9,79.248 78.283,79.832 87.351,82.118 105.156,82.55 107.696,82.55
  other v2: 84.201,54.102 87.249,54.102 72.898,105.664
  other v3: 105.334,106.705 77.521,107.29 77.521,108.255 86.995,112.903 88.519,112.903 90.17,112.903
  other v5: 48.006,104.902 48.006,106.934 48.006,112.522 48.006,115.062
H_OSC_IN: C4.2 U1.8 Y1.1 | length 9.3
  Top Layer w0.1: Y1.1@85.541,77.114 86.518,77.114 86.741,76.891 86.741,73.838 86.984,73.595 U1.8 ; Y1.1@85.622,77.523 C4.2@85.622,78.824
  Top Layer w0.381: Y1.1@85.541,77.114 Y1.1 Y1.1@85.622,77.523
H_OSC_OUT: C5.2 U1.9 Y1.3 | length 9.3
  Top Layer w0.1: C5.2 Y1.3@83.037,75.438 ; Y1.3@83.277,75.579 85.761,73.095 U1.9
  Top Layer w0.381: Y1.3@83.037,75.438 Y1.3 Y1.3@83.277,75.579
L_OSC_IN: C3.2 U1.12 Y2.2 | length 9.4
  Top Layer w0.1: Y2.2 Y2.2@82.906,71.938 ; C3.2 83.406,72.438 Y2.2@82.906,71.938 ; U1.12 88.917,71.595 88.113,70.79 84.455,70.79 83.807,71.438 83.406,71.438 Y2.2@82.906,71.938
L_OSC_OUT: C2.2 U1.13 Y2.1 | length 9.3
  Top Layer w0.1: Y2.1 Y2.1@82.906,69.438 ; C2.2 83.406,68.938 Y2.1@82.906,69.438 ; U1.13 89.707,71.038 88.901,71.038 88.449,70.587 84.455,70.587 83.807,69.938 83.406,69.938 Y2.1@82.906,69.438
LORA-AUX: J3.05 U1.58 | length 19.6
  Top Layer w0.1: U1.58 106.838,68.595 v1@106.98,68.453
  Top Layer w0.2: v1@106.98,68.453 v1(107.061,68.453)
  Bottom Layer w0.2: J3.05 99.263,56.845 107.061,64.643 v1(107.061,68.453)
LORA-M0: J3.01 U1.56 | length 19.3
  Top Layer w0.1: U1.56 106.62,67.595 106.905,67.31 108.204,67.31 v1(109.347,68.453)
  Bottom Layer w0.1: v1(109.347,68.453) 109.347,54.026 J3.01
LORA-M1: J3.02 U1.57 | length 18.5
  Top Layer w0.1: U1.57 106.53,68.095 106.934,67.691 107.442,67.691 v1(108.204,68.453)
  Bottom Layer w0.1: J3.02 106.883,58.623 108.204,59.944 v1(108.204,68.453)
NetD1_A: D1.A R2.1 | length 4
  Top Layer w0.2: R2.1 70.485,51.943 70.612,51.816 72.009,51.816 72.136,51.943 D1.A
NetD2_A: D2.A R3.1 | length 2
  Top Layer w0.2: R3.1 D2.A
NetD3_A: D3.A R4.1 | length 2
  Top Layer w0.2: R4.1 D3.A
NetD4_A: D4.A R5.1 | length 3.6
  Top Layer w0.2: D4.A 72.898,101.194 73.177,100.914 74.27,100.914 74.549,101.194 R5.1
NetJ1_01: J1.01 U1.94 | length 4
  Top Layer w0.1: U1.94 94.485,82.801 J1.01@94.488,82.804
NRST: C1.1 J2.05 U1.14 | length 19.3
  Top Layer w0.15: J2.05 C1.1@78.275,76.759 ; C1.1@78.29,76.759 78.316,76.733 v1(79.4,76.733) ; U1.14 89.793,70.565 91.182,70.565 v1(91.211,70.536)
  Top Layer w0.2: C1.1@78.275,76.759 C1.1 C1.1@78.29,76.759
  Bottom Layer w0.15: v1(79.4,76.733) 79.426,76.759 83.845,76.759 90.068,70.536 v1(91.211,70.536)
POWER_GPIO0: J12.3 U2.11 | length 86.1
  Top Layer w0.1: J12.3 45.339,123.063 51.943,116.459 51.943,98.34 52.493,97.79 91.008,97.79 91.44,98.222 U2.11
POWER_GPIO1: J12.4 U2.10 | length 82.3
  Top Layer w0.1: J12.4 44.704,124.333 52.324,116.713 52.324,98.552 52.705,98.171 90.805,98.171 92.126,99.492 U2.10
Prog-mode: J11.08 U2.25 | length 42.5
  Top Layer w0.1: U2.25@111.043,94.425 111.131,94.513 v1(113.259,94.513)
  Bottom Layer w0.1: J11.08 81.813,97.892 112.293,97.892 113.182,97.003 113.182,94.59 v1(113.259,94.513)
RESET: C23.2 J11.02 R1.2 U2.3 | length 14.2
  Top Layer w0.381: J11.02 85.249,102.076 88.03,102.076 C23.2 88.08,102.062 89.771,102.062 R1.2 90.808,102.08 91.44,102.712 91.44,107.34 92.495,108.395 U2.3@94.043,108.395
RX0-ESP: J11.05 U2.34 | length 46.6
  Top Layer w0.1: U2.34@111.043,105.855 111.055,105.867 v1(113.055,105.867)
  Bottom Layer w0.1: J11.05 81.382,103.403 81.382,100.228 83.287,98.323 112.37,98.323 113.055,99.009 v1(113.055,105.867)
RX1-ESP: U1.53 U2.17 | length 43.4
  Top Layer w0.1: U2.17@99.368,93.425 99.314,93.371 99.314,91.44 99.822,90.932 107.188,90.932 113.792,84.328 113.792,70.891 108.995,66.095 U1.53
RX2-ESP: U1.24 U2.27 | length 52.9
  Top Layer w0.1: U1.24 90.45,65.622 92.902,65.622 93.447,66.167 103.353,66.167 103.734,66.548 v1(103.734,67.183) ; U2.27@111.043,96.965 111.081,97.003 v1(114.122,97.003)
  Bottom Layer w0.1: v1(103.734,67.183) 111.481,74.93 111.481,89.383 114.833,92.735 114.833,96.444 114.352,96.926 114.199,96.926 v1(114.122,97.003)
RX_1-STM: U1.54 U2.18 | length 41.6
  Top Layer w0.1: v4(100.584,90.17) 107.442,90.17 113.411,84.201 113.411,71.272 108.733,66.595 U1.54 ; v4(100.584,91.694) 100.584,93.371 U2.18@100.638,93.425
  Bottom Layer w0.1: v4(100.584,90.17) v4(100.584,91.694)
RX_2-STM: U1.25 U2.28 | length 55.3
  Top Layer w0.1: U1.25 91.234,65.095 91.469,65.329 103.327,65.329 v1(103.861,65.862) ; U2.28@111.043,98.235 111.055,98.247 v1(113.462,98.247)
  Bottom Layer w0.1: v1(103.861,65.862) 103.861,66.421 111.912,74.473 111.912,89.205 115.316,92.608 115.316,97.409 114.478,98.247 v1(113.462,98.247)
RX_3-STM: J3.04 U1.47 | length 9.8
  Top Layer w0.1: J3.04 101.803,54.235 101.397,54.641 101.397,61.921 101.965,62.489 101.965,63.353 U1.47
SCL-ESP32: J10.03 J12.1 U2.36 | length 94.6
  Top Layer w0.1: J12.1 46.482,120.523 50.165,116.84 v4(50.165,116.459) ; U2.36@111.043,108.395 112.611,108.395 114.209,109.993 114.209,110.755 J10.03
  Bottom Layer w0.1: v4(50.165,116.459) 51.054,117.348 107.645,117.348 J10.03
SDA-ESP32: J10.04 J12.2 U2.33 | length 94
  Top Layer w0.1: J12.2 45.822,121.793 51.13,116.484 v4(51.13,115.57) ; U2.33@111.043,104.585 113.602,104.585 114.224,105.207 J10.04
  Bottom Layer w0.1: v4(51.13,115.57) 52.248,116.688 105.766,116.688 J10.04
STRIP0: J5.2 U1.22 | length 98.9
  Top Layer w0.1: v1(46.863,75.692) 47.193,75.362 68.275,75.362 73.177,70.46 73.177,64.897 74.371,63.703 87.986,63.703 88.373,64.091 88.373,66.351 88.616,66.595 U1.22
  Bottom Layer w0.1: J5.2 29.041,78.528 26.924,80.645 26.924,83.566 28.067,84.709 30.099,84.709 33.782,81.026 36.957,81.026 37.846,80.137 37.846,77.216 36.703,76.073 34.417,76.073 33.274,74.93 33.274,73.406 34.544,72.136 43.307,72.136 v1(46.863,75.692)
STRIP1: J5.3 U1.23 | length 88.3
  Top Layer w0.1: v1(46.863,74.803) 46.971,74.803 47.2,75.032 68.097,75.032 72.847,70.282 72.847,64.77 74.244,63.373 88.099,63.373 88.646,63.92 88.646,65.913 88.828,66.095 U1.23
  Bottom Layer w0.1: J5.3 31.635,80.645 36.703,80.645 37.465,79.883 37.465,77.343 36.576,76.454 34.163,76.454 32.893,75.184 32.893,73.152 34.29,71.755 43.815,71.755 v1(46.863,74.803)
STRIP2: J5.5 U1.46 | length 90.9
  Top Layer w0.1: v1(46.863,73.914) 47.625,74.676 67.92,74.676 72.517,70.079 72.517,64.618 74.066,63.068 84.074,63.068 85.014,62.128 85.014,60.452 86.182,59.284 98.4,59.284 101.485,62.369 U1.46
  Bottom Layer w0.1: J5.5 34.713,78.528 32.512,76.327 32.512,72.644 33.909,71.247 44.196,71.247 v1(46.863,73.914)
SW1: SW1.2 U1.29 | length 71.9
  Top Layer w0.1: SW1.2@63.5,102.87 SW1.2@63.523,102.893 ; SW1.2@66.04,103.988 SW1.2@66.04,104.14 ; v1(88.036,61.163) 88.9,60.3 92.634,60.3 92.985,60.651 U1.29 U1.29@93.038,63.32
  Bottom Layer w0.1: SW1.2@63.5,102.87 63.523,102.893 64.793,102.893 66.04,104.14 70.104,104.14 73.711,100.533 73.711,65.43 75.108,64.033 85.166,64.033 v1(88.036,61.163)
SW2: SW2.2 U1.30 | length 52.5
  Top Layer w0.1: SW2.2@66.017,82.527 SW2.2@66.04,82.55 ; v1(87.071,60.731) 87.859,59.944 92.913,59.944 93.485,60.516 U1.30
  Bottom Layer w0.1: SW2.2@63.5,81.28 64.747,82.527 66.017,82.527 66.04,82.55 71.857,82.55 73.101,81.305 73.101,65.075 74.574,63.602 84.201,63.602 v1(87.071,60.731)
SW3: SW3.2 U1.31 | length 36.6
  Top Layer w0.1: SW3.2@66.017,60.937 SW3.2@66.04,60.96 ; v1(86.182,60.3) 86.868,59.614 93.142,59.614 93.985,60.457 U1.31
  Bottom Layer w0.1: SW3.2@63.5,59.69 64.747,60.937 66.017,60.937 66.04,60.96 68.097,63.017 83.464,63.017 v1(86.182,60.3)
SWCLK: J2.02 U1.76 | length 37.3
  Top Layer w0.1: v1(103.454,80.391) 103.47,80.376 103.47,78.832 U1.76
  Bottom Layer w0.1: J2.02 78.283,71.45 78.283,77.622 80.493,79.832 99.593,79.832 100.152,80.391 v1(103.454,80.391)
SWDIO: J2.04 U1.72 | length 49.7
  Top Layer w0.1: U1.72 106.066,75.595 106.502,75.159 109.677,75.159 110.788,76.269 110.788,80.83 110.465,81.153 v1(109.931,81.153)
  Bottom Layer w0.1: J2.04 77.089,75.336 77.089,77.165 80.112,80.188 99.238,80.188 100.203,81.153 v1(109.931,81.153)
SWO: J2.06 U1.89 | length 25
  Top Layer w0.1: v1(96.977,81.559) 96.981,81.555 96.981,78.82 U1.89
  Bottom Layer w0.1: J2.06 77.292,80.62 96.596,80.62 96.977,81.001 v1(96.977,81.559)
TX0-ESP: J11.03 U2.35 | length 38.8
  Top Layer w0.1: v1(109.195,107.137) 111.031,107.137 U2.35@111.043,107.125
  Bottom Layer w0.1: J11.03 84.099,103.226 84.099,100.559 85.776,98.882 106.172,98.882 109.195,101.905 v1(109.195,107.137)
TX_3-STM: J3.03 U1.55 | length 24.2
  Top Layer w0.1: J3.03 104.343,57.506 110.033,63.195 v1@110.033,64.11 ; U1.55 105.231,67.07 108.747,67.07 110.414,68.736 v1(110.414,69.24)
  Bottom Layer w0.1: v1(110.099,64.133) 110.099,68.926 v1(110.414,69.24)
VCAP: C9.2 C22.1 U1.48 U1.73 | length 4
  Top Layer w0.2: C22.1 102.485,61.63 U1.48 ; U1.73 106.95,76.095 C9.2@107.124,75.921
VDD_MCU: C10.1 C11.2 C12.1 C13.2 C14.1 C15.1 C16.2 C17.2 C18.2 C19.2 C20.2 C21.2 J2.01 J3.06 J8.2 R2.2 U1.6 U1.11 U1.20 U1.21 U1.27 U1.50 U1.75 U1.100 | length 144.3
  Top Layer w0.1: C12.1@85.916,67.889 C12.1 ; C10.1@85.982,66.467 C10.1 ; C11.2@87.574,66.541 C11.2 C11.2@87.609,66.536 ; C13.2@87.574,68.029 C13.2 C13.2@87.609,68.034 ; C16.2 C16.2@91.485,80.918
  Top Layer w0.2: R2.2 v2(70.485,56.515) ; J2.01 J2.01@76.048,66.523 ; C14.1@84.183,56.896 C14.1 ; v1(84.861,68.021) 85.784,68.021 C12.1@85.916,67.889 ; v1(84.887,66.523) 85.926,66.523 C10.1@85.982,66.467 ; C10.1 C11.2@87.574,66.541 ; C12.1 C13.2@87.574,68.029 ; C11.2@87.609,66.536 88.168,67.095 U1.21 ; C13.2@87.609,68.034 88.048,67.595 U1.20 ; C20.2@87.719,71.984 87.83,72.095 U1.11 89.77,72.101 91.252,72.101 v1(91.262,72.111) ; C15.1 v1(87.833,74.651) 87.889,74.595 U1.6 ; C16.2@91.485,80.918 U1.100 91.488,78.813 91.488,77.422 v1(91.491,77.419) ; C19.2 91.985,61.518 U1.27 91.992,63.379 91.992,64.687 v1(91.999,64.694) ; v1(103.48,64.694) 103.482,64.691 103.482,63.674 103.485,63.671 U1.50 103.485,61.78 C18.2 ; v1(103.861,77.089) 103.863,77.092 105.204,77.092 U1.75 106.8,77.095 107.129,77.424 107.129,78.059 C17.2
  Top Layer w0.5: J8.2 C14.1@84.183,56.896 ; C14.1 84.223,56.892 85.652,56.892 v2(85.674,56.871) 95.504,56.871 96.723,55.651 J3.06
  Bottom Layer w0.2: v2(70.485,56.515) 70.485,57.404 70.866,57.785 84.76,57.785 v2(85.674,56.871) ; J2.01@76.048,66.523 v1(84.887,66.523) ; v1(84.861,68.021) 84.874,68.008 84.874,66.535 v1(84.887,66.523) ; 89.319,60.515 89.319,62.09 v1(84.887,66.523) ; v1(91.262,72.111) v1@91.262,72.192
  Bottom Layer w0.3: v1(87.833,74.651) 90.881,74.651 91.491,74.041 ; v1(91.262,72.111) 91.999,71.374 91.999,63.195 89.319,60.515 87.224,58.42 97.206,58.42 v1(103.48,64.694) 103.048,65.126 103.048,76.276 v1(103.861,77.089) ; v1@91.262,72.192 91.491,72.42 91.491,74.041 ; v1(91.491,77.419) 91.491,74.041
  Bottom Layer w0.5: v2(85.674,56.871) 87.224,58.42
pads on no net: J5.6 J8.TAB J9.TAB SW1.Un1 SW1.Un2 SW1.Un3 SW2.Un1 SW2.Un2 SW2.Un3 SW3.Un1 SW3.Un2 SW3.Un3 U1.1 U1.2 U1.3 U1.4 U1.5 U1.7 U1.15 U1.16 U1.17 U1.18 U1.28 U1.32 U1.33 U1.34 U1.35 U1.36 U1.37 U1.38 U1.39 U1.40 U1.41 U1.42 U1.43 U1.44 U1.45 U1.61 U1.62 U1.67 U1.68 U1.69 U1.70 U1.71 U1.77 U1.78 U1.79 U1.80 U1.81 U1.82 U1.83 U1.84 U1.85 U1.86 U1.87 U1.88 U1.90 U1.91 U1.92 U1.93 U1.97 U1.98 U2.4 U2.5 U2.6 U2.7 U2.8 U2.9 U2.12 U2.13 U2.14 U2.16 U2.19 U2.20 U2.21 U2.22 U2.26 U2.29 U2.30 U2.31 U2.32 U2.37 Y1.2 Y1.4

## Polygon pours and split planes (outlines as drawn)
GND on Top Layer "NONET_L-01_P-001" (solid, pour order 18): 104.115,104.8 104.064,104.8 104.064,100.914 99.035,100.914 99.035,105.918 103.327,105.918 105.029,107.62 106.045,107.62 106.401,107.264 106.401,106.401 105.867,105.867 105.181,105.867
GND on Top Layer "NONET_L-01_P-001" (solid, pour order 16): 86.512,111.049 90.551,111.049 90.551,112.014 91.237,112.7 91.237,113.64 90.907,113.97 86.385,113.97 86.03,113.614 86.03,112.471 86.512,111.989
GND on Top Layer "NONET_L-01_P-001" (solid, pour order 15): 114.3,52.07 73.939,52.07 73.152,52.857 73.152,83.312 74.93,85.09 113.284,85.09 114.808,83.566 114.808,52.578
GND on Top Layer "NONET_L-01_P-001" (solid, pour order 14): 43.586,106.731 43.586,105.105 46.787,105.105 47.092,104.8 47.092,103.962 47.295,103.759 48.87,103.759 49.073,103.962 49.073,107.925 48.895,108.102 47.295,108.102 47.092,107.899 47.092,107.036 46.787,106.731
GND on Top Layer "NONET_L-01_P-001" (solid, pour order 13): 43.536,114.605 43.536,112.979 46.736,112.979 47.041,112.674 47.041,111.836 47.244,111.633 48.819,111.633 49.022,111.836 49.022,115.799 48.844,115.976 47.244,115.976 47.041,115.773 47.041,114.91 46.736,114.605
+5 on Top Layer "NONET_L-01_P-001" (solid, pour order 12): 80.848,58.598 84.252,58.598 84.531,58.877 84.531,61.849 84.074,62.306 81.686,62.306 81.382,62.001 81.382,60.401 80.848,59.868 80.848,59.665
+5 on Top Layer "NONET_L-01_P-001" (solid, pour order 10): 41.758,105.131 36.5,105.131 32.995,108.636 32.995,110.388 33.68,111.074 36.246,111.074 37.16,110.16 37.16,107.518 37.973,106.705 41.758,106.705
+5-D1 on Top Layer "NONET_L-01_P-001" (solid, pour order 9): 41.732,114.579 36.678,114.579 36.322,114.935 33.985,114.935 33.376,114.325 33.376,112.573 34.112,111.836 35.763,111.836 36.932,113.005 41.732,113.005
3V3-ESP32 on Top Layer "NONET_L-01_P-001" (solid, pour order 8): 84.531,103.962 84.531,106.35 84.023,106.858 85.319,106.858 85.903,106.274 85.903,103.962
3V3-ESP32 on Top Layer "NONET_L-01_P-001" (solid, pour order 7): 90.297,103.2 89.281,103.2 89.281,106.07 88.494,106.858 89.586,106.858 89.789,107.061 90.297,106.553 90.297,103.607
3V3-ESP32 on Top Layer "NONET_L-01_P-001" (solid, pour order 5): 80.086,111.049 80.086,108.331 80.086,106.858 89.586,106.858 91.948,109.22 95.047,109.22 95.047,110.109 90.957,110.109 90.627,110.439 86.512,110.439 86.512,108.915 85.42,107.823 81.864,107.823 81.305,108.382 81.305,111.049
+5 on Top Layer "NONET_L-01_P-001" (solid, pour order 0): 82.398,111.049 82.398,108.585 82.626,108.356 85.242,108.356 85.471,108.585 85.471,108.687 85.471,110.388 84.277,110.388 83.617,111.049
GND on Top Layer "NONET_L-01_P-001" (solid, pour order 3): 78.994,111.049 78.994,108.814 79.578,108.229 79.578,106.858 77.292,106.858 77.064,107.086 77.064,108.509 77.318,108.763 77.724,108.763 77.775,108.814 77.775,111.049
+5 on Power (split plane): 52.471,118.384 52.548,118.321 52.637,118.273 52.732,118.244 52.832,118.235 116.33,118.235 116.33,51.31 25.91,51.31 25.91,126.49 44.366,126.49
GND on GND (split plane): 52.471,118.384 52.548,118.321 52.637,118.273 52.732,118.244 52.832,118.235 116.33,118.235 116.33,51.31 25.91,51.31 25.91,126.49 44.366,126.49

## Other copper
Top Layer:
  pour cut-out: 105.943,76.733 105.943,76.454 106.401,76.454 106.401,76.733
  pour cut-out: 84.391,73.596 84.772,73.596 84.836,73.66 84.709,73.787 84.709,73.914
  pour cut-out: 84.074,73.279 84.709,73.914 84.503,73.914 84.222,74.195 84.17,74.143 84.095,74.143
  pour cut-out: 82.241,74.719 82.241,74.677 82.717,74.201 84.037,74.201 84.037,74.276 84.089,74.328 83.693,74.725
  pour cut-out: 84.131,78.133 84.423,78.133 84.423,75.037 84.375,74.988 84.306,74.988 84.131,75.163
  pour cut-out: 81.676,71.134 81.676,70.242 83.672,70.242 84.118,70.688 83.678,71.128
  pour cut-out: 103.199,65.639 103.29,65.73 103.237,65.783 103.237,65.857 93.575,65.857 93.474,65.756 93.474,65.687 93.523,65.639
  pour cut-out: 91.059,85.09 91.44,85.09 92.044,84.486 92.044,85.089
  pour cut-out: 87.031,71.341 86.784,71.095 87.979,71.095 88.108,71.224 88.108,71.293 88.06,71.341
  pour cut-out: 109.322,82.398 108.407,83.312 104.318,83.312 103.886,82.88 103.879,82.887 103.879,84.6 104.369,85.09 108.502,85.09 109.322,84.271
  pour cut-out: 103.879,79.807 103.879,84.6 104.369,85.09 92.969,85.09 92.969,81.231 94.058,80.142 94.46,80.142 94.795,79.807
  pour cut-out: 92.116,80.57 92.191,80.57 92.243,80.623 92.942,79.924 92.942,79.855 92.893,79.807 92.091,79.807 92.091,79.595 92.05,79.553 91.872,79.553 91.872,79.8 91.879,79.807 91.846,79.807 91.846,80.257 92.116,80.257
  pour cut-out: 107.881,78.781 108.168,78.781 109.322,79.934 109.322,84.277 110.815,82.784 110.815,81.407 110.478,81.07 110.478,78.982 110.236,78.74
  pour cut-out: 100.894,62.382 94.295,62.382 94.295,60.457 93.677,59.839 93.677,59.642 93.726,59.594 98.271,59.594 100.943,62.265
  pour cut-out: 86.182,58.974 84.966,58.974 84.79,58.798 84.79,60.058 84.865,60.058 84.917,60.11
  pour cut-out: 81.142,62.101 81.142,62.215 80.599,62.758 83.912,62.758 83.912,62.743 83.965,62.69 83.91,62.634 83.91,62.565 81.686,62.565 81.611,62.489 81.503,62.489
  pour cut-out: 104.536,62.187 107.137,64.788 107.137,64.795 106.208,64.795 106.114,64.701 104.199,64.701 103.846,64.348 103.846,62.187
  pour cut-out: 92.545,64.364 102.879,64.364 102.895,64.347 102.895,64.11 103.099,64.11 103.092,64.117 103.092,64.478 102.931,64.638 102.931,65.019 92.589,65.019 92.462,64.892 92.545,64.809
  pour cut-out: 90.78,64.701 91.387,64.701 91.592,64.496 91.592,64.128
  pour cut-out: 88.54,61.098 88.544,61.102 88.544,63.373 88.504,63.373 88.194,63.063 84.683,63.063 84.683,62.994 84.635,62.946 85.3,62.28 85.3,60.604 85.512,60.392 85.678,60.392
  pour cut-out: 74.066,62.758 73.731,62.758 73.152,62.179 73.152,63.378 73.221,63.378 73.269,63.427
  pour cut-out: 110.236,78.74 110.478,78.982 110.478,78.74
  pour cut-out: 107.881,78.781 107.922,78.74 110.49,78.74 110.49,76.41 109.549,75.469 107.838,75.469 107.881,75.512 107.881,77.353
  pour cut-out: 106.197,74.856 106.197,72.905 109.271,72.905 110.815,74.449 110.815,75.692 110.746,75.692 110.698,75.741 109.829,74.872 106.213,74.872
  pour cut-out: 106.197,69.905 109.192,69.905 109.945,70.658 109.945,70.732 109.892,70.785 106.197,70.785
  pour cut-out: 112.984,72.21 110.598,69.824 111.035,69.387 111.035,69.335 113.101,71.401 113.101,72.162
  pour cut-out: 109.519,64.785 109.534,64.77 114.3,64.77 114.808,64.262 114.808,69.765 114.734,69.765 114.681,69.818 109.648,64.785

## Silkscreen, mask and mechanical layers (free items; w line width, h text height)
Top Overlay:
  drawing of 5 lines, arcs and shapes, not listed
  text "Communication" at 36.817,126.138 h1.3 r270
  text "PSU" at 37.833,123.471 h1.3 r270
  text "GND 5V SCL SDA" at 114.106,106.453 h1 r270
  text "OLED" at 114.944,104.116 h1 r270
  text "5V-2" at 50.646,101.025 h1
  text "5V-1" at 50.646,99.501 h1
  text "GND  RX   TX    3V" at 76.3,99.429 h1.3
  text "PROG GND GND RES" at 76.3,98.511 h1.09
  text "ESP PROG" at 78.459,97.472 h1.3
  text "BOOT0" at 92.81,83.754 h1.09
  text "Made and design" at 40.907,81.688 h0.5 r270
  text "by M.L" at 39.891,77.116 h0.5 r270
  text "LED mainboard V3.0" at 48.333,72.063 h0.7 r270
  text "SWD" at 73.368,71.931 h1.3 r90
  text "19.11.2023" at 46.936,66.221 h0.7 r270
  text "VDD  SWCLK GND SWDIO NRST  SWO" at 74.16,65.531 h0.9 r90
  text "LORA Module" at 99.008,56.627 h1.09
  text "GND  VDD  AUX  RX     TX     M1    M0" at 93.115,55.712 h1.1

## Text inside footprints (layer, text, board x,y; h text height)
U1: Top Overlay "*" at 88.075,77.091 h1.27; Mechanical 13 "*" at 88.075,77.091 h1.27